# Altium PCB EasyEDA_ZX64_rev0.pcbdoc (part 2 of 3)
Units mil, origin at the board's own origin, x right, y up, seen from the top; angles counter-clockwise.
Board outline 12792.03 x 5307.23 mil, 2 copper layers (Top Layer, Bottom Layer); 152 components, 165 nets, 989 pads, 228 vias.
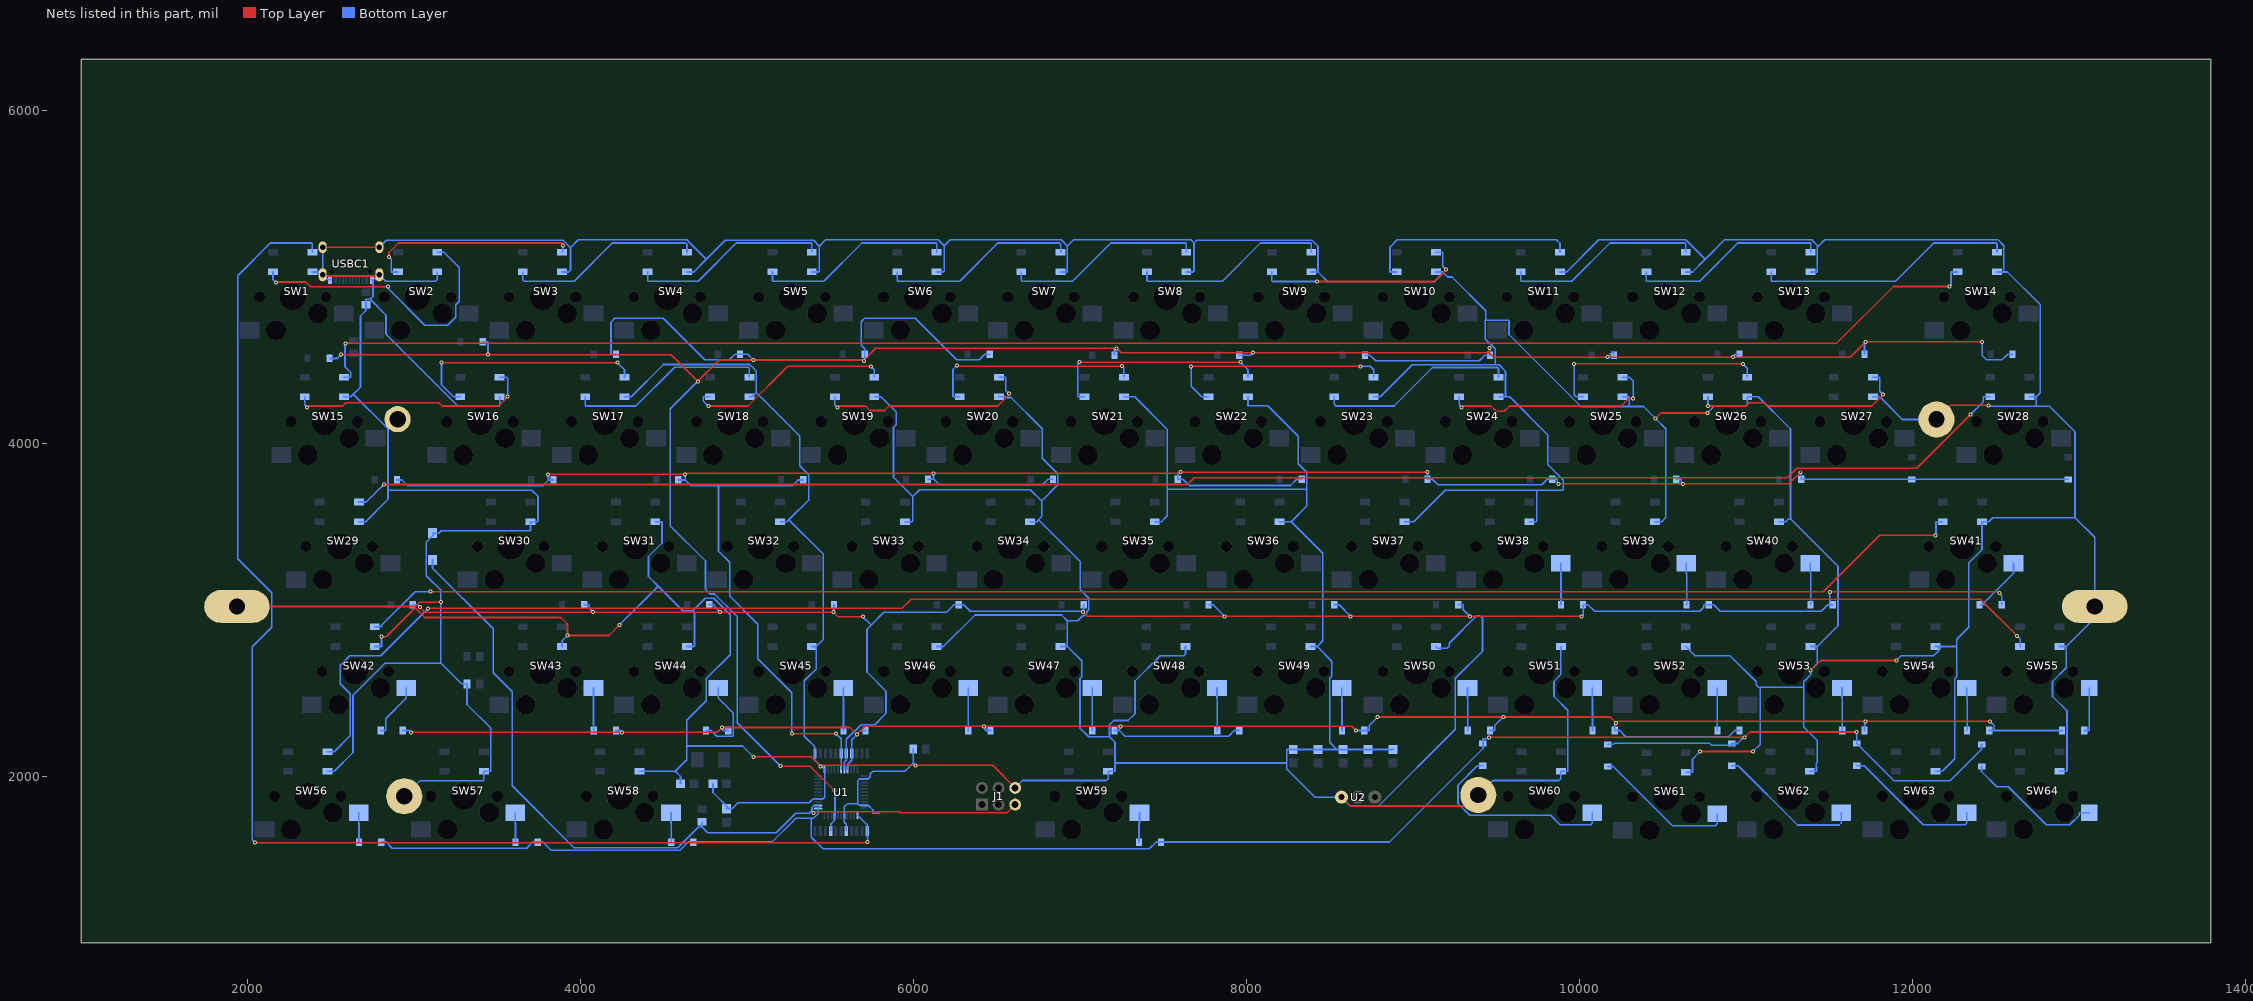
[diagram p2: the nets of this part, all layers, seen from the top]

## Via types
v1: diameter 24.02, hole 12.01, Top Layer to Bottom Layer, tented both sides, 228 vias

## Nets (pads, with @x,y where several pads share a name; then routed paths per layer and width w, separated by ;. In a path a pad name is that pad's centre, name@x,y a point inside that pad or via, vN(x,y) a via of type N, cw(c..) or ccw(c..) an arc to the next point about the centre after c; other vN are vias at no path point) (continued)
D38_2: D38.2 SW38.2 | length 250.5
  Bottom Layer w10: SW38.2@9887.28,3280 9887.28,3219.76 9888.55,3218.49 D38.2@9888.55,3030
D39_2: D39.2 SW39.2 | length 250.5
  Bottom Layer w10: SW39.2@10642.28,3280 10642.28,3219.76 10643.55,3218.49 D39.2@10643.55,3030
D40_2: D40.2 SW40.2 | length 250.5
  Bottom Layer w10: SW40.2@11387.28,3280 11387.28,3219.76 11388.55,3218.49 D40.2@11388.55,3030
D41_2: D41.2 SW41.2 | length 351.8
  Bottom Layer w10: D41.2@12403.55,3030 12433.24,3030 12433.24,3045.72 12607.28,3219.76 SW41.2@12607.28,3280
D42_2: D42.2 SW42.2 | length 336.1
  Bottom Layer w10: D42.2@2798.55,2275 2828.24,2275 2828.24,2345.72 2952.28,2469.76 SW42.2@2952.28,2530
D43_2: D43.2 SW43.2 | length 255.5
  Bottom Layer w10: SW43.2@4077.28,2530 4077.28,2309.9 4078.55,2308.63 D43.2@4078.55,2275
D44_2: D44.2 SW44.2 | length 501
  Bottom Layer w10: D44.2@4753.55,2275 4783.24,2275 4816.94,2241.3 4913.66,2241.3 4916.57,2244.21 4916.57,2380.47 4827.28,2469.76 SW44.2@4827.28,2530
D45_2: D45.2 SW45.2 | length 255.5
  Bottom Layer w10: SW45.2@5577.28,2530 5577.28,2469.76 5578.55,2468.49 D45.2@5578.55,2275
D46_2: D46.2 SW46.2 | length 255.5
  Bottom Layer w10: SW46.2@6327.28,2530 6327.28,2309.9 6328.55,2308.63 D46.2@6328.55,2275
D47_2: D47.2 SW47.2 | length 255.5
  Bottom Layer w10: SW47.2@7072.28,2530 7072.28,2469.76 7073.55,2468.49 D47.2@7073.55,2275
D48_2: D48.2 SW48.2 | length 255.5
  Bottom Layer w10: SW48.2@7822.28,2530 7822.28,2469.76 7823.55,2468.49 D48.2@7823.55,2275
D49_2: D49.2 SW49.2 | length 255.5
  Bottom Layer w10: SW49.2@8572.28,2530 8572.28,2469.76 8573.55,2468.49 D49.2@8573.55,2275
D50_2: D50.2 SW50.2 | length 255.5
  Bottom Layer w10: SW50.2@9327.28,2530 9327.28,2469.76 9328.55,2468.49 D50.2@9328.55,2275
D51_2: D51.2 SW51.2 | length 255.5
  Bottom Layer w10: SW51.2@10077.28,2530 10077.28,2469.76 10078.55,2468.49 D51.2@10078.55,2275
D52_2: D52.2 SW52.2 | length 255.5
  Bottom Layer w10: SW52.2@10827.28,2530 10827.28,2469.76 10827.28,2309.9 10828.55,2308.63 D52.2@10828.55,2275
D53_2: D53.2 SW53.2 | length 255.5
  Bottom Layer w10: SW53.2@11577.28,2530 11577.28,2469.76 11578.55,2468.49 D53.2@11578.55,2275
D54_2: D54.2 SW54.2 | length 255.5
  Bottom Layer w10: SW54.2@12327.28,2530 12327.28,2469.76 12328.55,2468.49 D54.2@12328.55,2275
D55_2: D55.2 SW55.2 | length 285
  Bottom Layer w10: D55.2@13031.82,2275 13061.5,2275 13061.5,2469.15 13062.15,2469.8 SW55.2@13062.15,2530
D56_2: D56.2 SW56.2 | length 175.5
  Bottom Layer w10: SW56.2@2667.28,1780 2667.28,1719.76 2668.55,1718.49 D56.2@2668.55,1605
D57_2: D57.2 SW57.2 | length 175.5
  Bottom Layer w10: SW57.2@3607.28,1780 3607.28,1719.76 3608.55,1718.49 D57.2@3608.55,1605
D58_2: D58.2 SW58.2 | length 175.5
  Bottom Layer w10: SW58.2@4542.28,1780 4542.28,1719.76 4543.55,1718.49 D58.2@4543.55,1605
D59_2: D59.2 SW59.2 | length 176.5
  Bottom Layer w10: D59.2@7353.55,1605 7353.55,1716.03 7357.28,1719.76 SW59.2@7357.28,1780
D60_2: D60.2 SW60.2 | length 1233.1
  Bottom Layer w10: D60.2@9420.18,2063.37 9386.55,2063.37 9270.03,1946.85 9270.03,1836.74 9341.52,1765.25 9827.6,1765.25 9883.48,1709.37 10066.89,1709.37 10077.28,1719.76 SW60.2@10077.28,1780
D61_2: D61.2 SW61.2 | length 869.4
  Bottom Layer w10: D61.2@10170.18,2058.37 10203.81,2058.37 10559.22,1702.96 10815.48,1702.96 10827.28,1714.76 SW61.2@10827.28,1775
D62_2: D62.2 SW62.2 | length 870.3
  Bottom Layer w10: D62.2@10915.18,2063.37 10953.26,2063.37 11309.76,1706.87 11559.39,1706.87 11572.28,1719.76 SW62.2@11572.28,1780
D63_2: D63.2 SW63.2 | length 873.3
  Bottom Layer w10: D63.2@11665.18,2063.37 11710.15,2063.37 12064.15,1709.37 12316.89,1709.37 12327.28,1719.76 SW63.2@12327.28,1780
D64_2: D64.2 SW64.2 | length 847.5
  Bottom Layer w10: D64.2@12415.18,2058.37 12415.18,2028.68 12506.08,1937.78 12575.58,1937.78 12804.55,1708.81 12945.81,1708.81 13001.95,1764.95 13001.95,1780 SW64.2@13062.15,1780
GND: C1.1 C2.1 C3.1 C4.1 C5.1 C6.1 C7.1 C8.1 J1.6 KEY1.1 pad.1 R2.2 R4.1 R5.2 SW1.5 SW2.5 SW3.5 SW4.5 SW5.5 SW6.5 SW7.5 SW8.5 SW9.5 SW10.5 SW11.5 SW12.5 SW13.5 SW14.5 SW15.5 SW16.5 SW17.5 SW18.5 SW19.5 SW20.5 SW21.5 SW22.5 SW23.5 SW24.5 SW25.5 SW26.5 SW27.5 SW28.5 SW29.5 SW30.5 SW31.5 SW32.5 SW33.5 SW34.5 SW35.5 SW36.5 SW37.5 SW38.5 SW39.5 SW40.5 SW41.5 SW42.5 SW43.5 SW44.5 SW45.5 SW46.5 SW47.5 SW48.5 SW49.5 SW50.5 SW51.5 SW52.5 SW53.5 SW54.5 SW55.5 SW56.5 SW57.5 SW58.5 SW59.5 SW60.5 SW61.5 SW62.5 SW63.5 SW64.5 U1.5 U1.15 U1.23 U1.35 U1.43 U2.1 USBC1.0 USBC1.A1 USBC1.A12 USBC1.B1 USBC1.B12 | length 72037.8
  Top Layer w10: pad.1@1935.18,3020 3005.7,3020 ; USBC1.0@2449.91,5012.45 2456.66,5005.69 2783.7,5005.69 USBC1.0@2790.45,5012.45 ; USBC1.0@2449.91,5177.8 USBC1.0@2790.45,5177.8 ; v1(2803.89,2838.67) 2832.66,2838.67 3005.7,3011.71 ; v1(3160.44,3046.38) 3032.08,3046.38 3005.7,3020 ; v1(4232.19,2908.38) 4169.8,2845.99 v1(3920.79,2845.99) 3920.79,2914.77 3881.76,2953.8 3063.61,2953.8 3005.7,3011.71 ; v1(5037.72,2116.37) 5384.14,2116.37 v1(5441.97,2058.54) 5448.99,2065.56 v1(6011.27,2065.56) 6474.62,2065.56 J1.6@6610.18,1930 ; U2.1@8570.18,1875 8623.42,1821.76 9325.92,1821.76 pad.1@9392.04,1887.88 ; v1(10456.22,4149.71) 10489.17,4182.66 v1(10767.63,4182.66) ; v1(10724.21,2148.47) v1(11042.67,2148.47) ; v1(11388.29,2635.02) 11449.29,2696.02 v1(11904.68,2696.02) ; pad.1@12144.98,4143.7 12229.19,4227.91 v1@12456.65,4227.91 ; 3005.7,3011.71 3005.7,3020
  Bottom Layer w10: SW1.5@2388.29,5029.61 2428.78,5029.61 USBC1.0@2449.9,5029.61 ; USBC1.0@2449.91,5177.8 USBC1.0@2449.9,5029.61 ; SW56.5@2478.29,2029.61 2518.78,2029.61 2632.09,2142.92 2632.09,2485.85 2824.65,2678.41 3160.44,2678.41 ; USBC1.B12@2500.1,4982.2 USBC1.A1@2488.29,4982.2 2480.15,4982.2 USBC1.0@2449.91,5012.45 USBC1.0@2449.9,5029.61 ; SW15.5@2578.29,4279.61 2618.78,4279.61 2634.49,4295.32 ; SW29.5@2668.29,3529.61 2708.78,3529.61 2842.49,3663.32 2842.49,3719.21 ; USBC1.B1@2740.26,4982.19 USBC1.A12@2752.07,4982.19 ; SW42.5@2763.29,2779.61 2803.78,2779.61 2803.78,2838.56 v1(2803.89,2838.67) ; USBC1.0@2790.45,5177.8 2831.86,5219.2 3893.85,5219.2 3938.45,5174.6 ; pad.1@2900.18,4145 2842.49,4087.31 ; pad.1@2940.28,1880 3034.46,1974.18 3414.67,1974.18 3418.29,1977.8 SW57.5@3418.29,2029.61 3458.78,2029.61 3458.85,2029.68 3458.85,2289.55 3317.14,2431.26 R5.2@3317.14,2555 3283.85,2555 3160.44,2678.41 ; KEY1.1@3110.18,3460.12 KEY1.1@3125.09,3460.12 ; SW2.5@3138.29,5029.61 3138.29,4984.29 3128.19,4974.19 2828.72,4974.19 USBC1.0@2790.45,5012.45 2760.2,4982.19 USBC1.A12@2752.07,4982.19 ; SW16.5@3513.29,4279.61 3513.29,4227.09 3510.38,4224.18 3261.59,4224.18 2830.48,4655.29 2830.48,4769.9 2735.14,4865.24 ; SW43.5@3888.29,2779.61 3888.29,2813.49 v1(3920.79,2845.99) ; SW3.5@3888.29,5029.61 3928.78,5029.61 3938.45,5039.28 3938.45,5174.6 ; v1(4232.19,2908.38) 4465.62,3141.81 ; SW17.5@4263.29,4279.61 4303.78,4279.61 4497.72,4473.55 5015.86,4473.55 5054.29,4435.12 5054.29,4305.43 ; SW58.5@4353.29,2029.61 4568.27,2029.61 ; SW31.5@4448.29,3529.61 4488.78,3529.61 4488.78,3401.61 4406.95,3319.78 4406.95,3200.48 4465.62,3141.81 ; C6.1@4599.63,1955 4599.63,1998.25 4568.27,2029.61 ; SW44.5@4638.29,2779.61 4678.78,2779.61 4683.62,2784.45 4683.62,2983.15 4673.26,2993.51 ; SW4.5@4638.29,5029.61 4678.78,5029.61 4754.18,5105.01 ; C7.1@4794.63,1955 4794.63,1902.9 C8.1@4891.98,1805.55 ; C8.1@4875.18,1805.55 C8.1@4891.98,1805.55 ; SW18.5@5013.29,4279.61 5028.47,4279.61 5054.29,4305.43 ; v1(5037.72,2116.37) 4972.2,2181.89 4637.49,2181.89 ; SW32.5@5198.29,3529.61 5238.78,3529.61 5250.73,3541.56 ; SW45.5@5388.29,2779.61 5402.61,2779.61 SW45.5@5414.97,2779.61 ; SW5.5@5388.29,5029.61 5428.78,5029.61 5433.87,5034.7 5433.87,5184.92 ; v1(5441.97,2058.54) v1@5443.36,2059.93 ; U1.5@5596.08,1672.12 5596.08,1712.64 5584.19,1724.53 U1.5@5584.19,1766.7 5584.19,1816.72 5602.74,1835.27 5663.92,1835.27 ; SW19.5@5763.29,4279.61 5803.78,4279.61 5895.51,4187.88 5895.51,4110.99 5879.66,4095.14 5879.66,3796.01 5994.95,3680.72 ; U1.43@5796.87,1778.42 5756.35,1778.42 5756.27,1778.5 5756.27,1797.97 5728.49,1825.75 5702.3,1825.75 5673.44,1825.75 5663.92,1835.27 ; SW33.5@5948.29,3529.61 5988.78,3529.61 5994.95,3535.78 5994.95,3680.72 ; R2.2@5997.14,2165 5997.14,2079.69 ; v1(6011.27,2065.56) 5997.14,2079.69 ; SW46.5@6138.29,2779.61 6178.78,2779.61 6368.38,2969.21 6888.29,2969.21 6923.85,2933.65 ; SW6.5@6138.29,5029.61 6178.78,5029.61 6183.86,5034.69 6183.86,5186.92 ; SW20.5@6513.29,4279.61 6553.78,4279.61 6557.95,4275.44 6585.49,4275.44 6773.53,4087.4 6773.53,3910.55 6866.57,3817.51 6866.57,3751.31 6769.25,3653.99 ; J1.6@6610.18,1930 6654.37,1974.19 7158.19,1974.19 7168.29,1984.29 SW59.5@7168.29,2029.61 7208.78,2029.61 7209.61,2030.44 7209.61,2079.45 ; SW34.5@6698.29,3529.61 6738.78,3529.61 6750.21,3541.04 ; SW47.5@6883.29,2779.61 6923.78,2779.61 ; SW7.5@6883.29,5029.61 6923.78,5029.61 6923.85,5029.68 6923.85,5185.81 ; SW21.5@7263.29,4279.61 7327.71,4279.61 7524,4083.32 7524,3724.8 ; SW35.5@7448.29,3529.61 7488.78,3529.61 7524,3564.83 7524,3724.8 ; SW48.5@7633.29,2779.61 7633.29,2734.16 7623.31,2724.18 7480.87,2724.18 7329.61,2572.92 7329.61,2376.17 7288.35,2334.91 7201.77,2334.91 7176.88,2310.02 7176.88,2236.55 ; SW8.5@7638.29,5029.61 7678.78,5029.61 7684.31,5035.14 7684.31,5203.19 ; SW22.5@8008.29,4279.61 8008.29,4225.99 8127.27,4225.99 8310.06,4043.2 8310.06,3877.71 8361.57,3826.2 8361.57,3724.8 ; SW36.5@8198.29,3529.61 8238.78,3529.61 8267.79,3529.61 ; SW49.5@8383.29,2779.61 8423.78,2779.61 ; SW9.5@8388.29,5029.61 8428.78,5029.61 8428.85,5029.68 ; SW23.5@8763.29,4279.61 8803.78,4279.61 8995.73,4471.56 9494.25,4471.56 ; C5.1@8880.18,2160.55 C4.1@8730.18,2160.55 C3.1@8580.18,2160.55 8542.62,2160.55 ; SW37.5@8948.29,3529.61 8988.78,3529.61 9003.59,3529.61 9193.19,3719.21 9743.91,3719.21 ; SW50.5@9138.29,2779.61 9149.39,2768.51 9203.72,2768.51 9217.22,2782.01 9217.22,2799.32 9380.39,2962.49 9403.87,2962.49 9417.02,2949.34 9417.02,2750.81 9254.41,2588.2 9254.41,2283.15 8792.98,1821.72 8623.46,1821.72 U2.1@8570.18,1875 8410.71,1875 8242.17,2043.54 8242.17,2079.45 ; SW10.5@9138.29,5029.61 9178.78,5029.61 9182.75,5025.65 ; pad.1@9392.04,1887.88 9478.35,1974.19 9878.19,1974.19 9888.29,1984.29 SW60.5@9888.29,2029.61 9928.78,2029.61 9929.57,2030.4 9929.57,2396.61 9846.95,2479.23 9846.95,2569.78 9888.29,2611.12 SW51.5@9888.29,2779.61 ; SW24.5@9513.29,4279.61 9555.19,4279.61 ; SW38.5@9698.29,3529.61 9738.78,3529.61 9743.91,3534.74 9743.91,3719.21 ; SW11.5@9883.29,5029.61 9923.78,5029.61 10116.44,5222.27 10638.58,5222.27 10755.01,5105.84 ; SW25.5@10258.29,4279.61 10298.78,4279.61 10298.78,4221.7 ; SW39.5@10453.29,3529.61 10493.78,3529.61 10518.53,3554.36 10518.53,4087.4 v1(10456.22,4149.71) 10384.23,4221.7 10298.78,4221.7 ; SW61.5@10638.29,2024.61 10678.78,2024.61 10678.78,2103.04 v1(10724.21,2148.47) ; SW52.5@10638.29,2779.61 10693.72,2724.18 10904.46,2724.18 11061.46,2567.18 11061.46,2548.06 11075.36,2534.16 11085.58,2534.16 ; SW12.5@10638.29,5029.61 10678.78,5029.61 10755.01,5105.84 ; v1(10767.63,4182.66) 10809.15,4224.18 10999.89,4224.18 11008.29,4232.58 SW26.5@11008.29,4279.61 11074.6,4279.61 11268.1,4086.11 11268.1,3543.49 ; v1(11042.67,2148.47) 11085.58,2191.38 11085.58,2534.16 ; SW40.5@11198.29,3529.61 11238.78,3529.61 11252.66,3543.49 11268.1,3543.49 ; SW62.5@11383.29,2029.61 11423.78,2029.61 11423.78,2055.36 11421.66,2057.48 11421.66,2076.58 11427.7,2082.62 11427.7,2215.05 11346.95,2295.8 11346.95,2534.16 ; SW53.5@11388.29,2779.61 11428.78,2779.61 ; SW13.5@11388.29,5029.61 11428.78,5029.61 11428.85,5029.68 11428.85,5178.22 11433.67,5183.04 ; SW27.5@11763.29,4279.61 11803.78,4279.61 11939.69,4143.7 pad.1@12144.98,4143.7 ; v1(11904.68,2696.02) 11931.82,2723.16 12127.16,2723.16 12158.54,2754.54 SW54.5@12158.54,2779.61 ; SW63.5@12138.29,2029.61 12178.78,2029.61 12254.4,2105.23 12254.4,2587.18 12265.86,2598.64 12265.86,2779.61 ; SW54.5@12138.29,2779.61 SW54.5@12158.54,2779.61 ; v1@12456.65,4227.91 12462.69,4221.87 12743.78,4221.87 ; SW14.5@12508.29,5029.61 12549.25,5029.61 ; SW28.5@12703.29,4279.61 12743.78,4279.61 ; SW64.5@12883.29,2029.61 12923.78,2029.61 12928.31,2034.14 12928.31,2392.87 12841.95,2479.23 12841.95,2569.78 12923.78,2651.61 12923.78,2779.61 ; SW55.5@12883.29,2779.61 12923.78,2779.61 ; 2634.49,4295.32 2676.89,4337.72 2676.89,4765.38 2710.18,4798.67 R4.1@2710.18,4831.96 2710.18,4848.6 2710.18,4865.24 2735.14,4865.24 ; 2634.49,4295.32 2842.49,4087.31 ; 2735.14,4865.24 2752.07,4882.17 USBC1.A12@2752.07,4982.19 ; 2842.49,3719.21 2842.49,4087.31 ; 2842.49,3719.21 3706.88,3719.21 3744.1,3681.99 3744.1,3534.93 3738.78,3529.61 SW30.5@3698.29,3529.61 3698.29,3477.8 3694.67,3474.18 3162,3474.18 3147.94,3460.12 KEY1.1@3125.09,3460.12 ; KEY1.1@3125.09,3460.12 3072.35,3407.38 3072.35,3205.56 3160.44,3117.47 v1(3160.44,3046.38) 3160.44,2678.41 ; 3938.45,5174.6 3986.12,5222.27 4636.91,5222.27 4754.18,5105.01 ; 4465.62,3141.81 4613.92,2993.51 4673.26,2993.51 ; 4568.27,2029.61 4637.49,2098.83 4637.49,2181.89 ; 4637.49,2181.89 4637.49,2336.28 4754.4,2453.19 4754.4,2587.18 4897.97,2730.75 4897.97,2970.05 4799.35,3068.67 4748.42,3068.67 4673.26,2993.51 ; 4754.18,5105.01 4868.37,5219.2 5399.59,5219.2 5433.87,5184.92 ; C8.1@4891.98,1805.55 4908.78,1805.55 4944.64,1841.41 5291.79,1841.41 U1.15@5332.3,1841.41 5372.82,1841.41 5396.53,1865.12 U1.15@5426.71,1865.12 5456.24,1865.12 5466.08,1874.96 U1.23@5466.08,2042.29 5448.44,2059.93 v1@5443.36,2059.93 ; 5054.29,4305.43 5315.27,4044.45 5315.27,3864.83 5369.32,3810.78 5369.32,3660.15 5250.73,3541.56 ; 5250.73,3541.56 5457.39,3334.9 5457.39,2822.03 SW45.5@5414.97,2779.61 ; SW45.5@5414.97,2779.61 5414.97,2644.61 5343.99,2573.63 5343.99,2240.33 5407.11,2177.21 U1.23@5407.11,2136.69 5407.11,2116.44 5407.11,2096.18 v1@5443.36,2059.93 ; 5433.87,5184.92 5471.22,5222.27 6148.51,5222.27 6183.86,5186.92 ; 5663.92,1835.27 5663.92,1974.37 5672.78,1983.23 U1.35@5702.3,1983.23 5726.76,1983.23 5740.3,1996.77 5740.3,2014.34 5756.35,2030.39 U1.35@5796.87,2030.39 5947.84,2030.39 5997.14,2079.69 ; 5994.95,3680.72 6036.09,3721.86 6701.38,3721.86 6769.25,3653.99 ; 6183.86,5186.92 6219.21,5222.27 6887.39,5222.27 6923.85,5185.81 ; 6750.21,3541.04 7000.06,3291.18 7000.06,3122.61 7053.04,3069.63 7053.04,3001.13 7039.82,2987.91 7039.82,2977.8 7026.32,2964.3 7016.21,2964.3 6985.56,2933.65 6923.85,2933.65 ; 6750.21,3541.04 6769.25,3560.08 6769.25,3653.99 ; 6923.78,2779.61 7010.08,2693.31 7010.08,2597.86 6999.4,2587.18 6999.4,2288.55 7051.4,2236.55 7176.88,2236.55 ; 6923.78,2779.61 6923.85,2779.68 6923.85,2933.65 ; 6923.85,5185.81 6960.31,5222.27 7665.23,5222.27 7684.31,5203.19 ; 7176.88,2236.55 7209.61,2203.82 7209.61,2079.45 ; 7209.61,2079.45 8242.17,2079.45 ; 7524,3724.8 8361.57,3724.8 ; 7684.31,5203.19 7700.48,5219.36 8393.48,5219.36 8428.85,5183.99 8428.85,5029.68 ; 8242.17,2079.45 8242.17,2160.1 8242.62,2160.55 C1.1@8280.18,2160.55 C2.1@8430.18,2160.55 8542.62,2160.55 ; 8267.79,3529.61 8457.39,3340.01 8457.39,2813.22 8423.78,2779.61 ; 8267.79,3529.61 8361.57,3623.39 8361.57,3724.8 ; 8423.78,2779.61 8512.71,2690.68 8512.71,2601.5 8499.41,2588.2 8499.41,2203.76 8542.62,2160.55 ; 8428.85,5029.68 8488.18,4970.35 9127.45,4970.35 9182.75,5025.65 ; 9182.75,5025.65 9209.42,4998.97 9234.31,4998.97 9436.22,4797.06 9436.22,4740.31 ; 9436.22,4740.31 9433.31,4737.4 9433.31,4626.45 9454.86,4604.9 9457.69,4604.9 9494.25,4568.34 9494.25,4471.56 ; 9436.22,4740.31 9573.8,4740.31 9576.71,4737.4 9576.71,4654.06 10009.07,4221.7 10298.78,4221.7 ; 9494.25,4471.56 9517.11,4471.56 9555.19,4433.48 9555.19,4279.61 ; 9555.19,4279.61 9580.33,4279.61 9810.27,4049.67 9810.27,3872.89 9903.05,3780.11 9903.05,3719.21 9743.91,3719.21 ; 10755.01,5105.84 10871.44,5222.27 11394.43,5222.27 11433.67,5183.04 ; 11085.58,2534.16 11346.95,2534.16 ; 11268.1,3543.49 11270.6,3543.49 11553.15,3260.94 11553.15,2903.98 11428.78,2779.61 ; 11346.95,2534.16 11346.95,2568.02 11388.29,2609.36 v1(11388.29,2635.02) 11428.78,2675.51 11428.78,2779.61 ; 11433.67,5183.04 11472.9,5222.27 12514.19,5222.27 12549.25,5187.21 12549.25,5029.61 ; SW54.5@12158.54,2779.61 12178.78,2779.61 12265.86,2779.61 ; 12265.86,2779.61 12265.86,2823.15 12338.6,2895.89 12338.6,3281.43 12418.29,3361.12 SW41.5@12418.29,3529.61 12458.78,3529.61 12482.78,3553.61 12977.03,3553.61 ; 12549.25,5029.61 12571.66,5029.61 12767.39,4833.88 12767.39,4303.22 12743.78,4279.61 ; 12743.78,4221.87 12825.13,4221.87 12977.03,4069.97 12977.03,3553.61 ; 12743.78,4221.87 12743.78,4279.61 ; 12923.78,2779.61 13095.18,2951.01 pad.1@13095.18,3020 13095.18,3435.46 12977.03,3553.61
  other v1: 12456.65,4227.91
RESET: J1.5 KEY1.2 R1.2 U1.13 | length 4977.3
  Top Layer w10: v1(5398.01,1780.76) 5404.16,1786.91 5914.19,1786.91 5920.34,1780.76 6560.94,1780.76 J1.5@6610.18,1830
  Bottom Layer w10: KEY1.2@3110.18,3299.88 3110.18,3250.21 3474.16,2886.23 3474.16,2622.52 3589.05,2507.63 3589.05,1942.34 3960.09,1571.3 4583.67,1571.3 4709.09,1696.72 4730.18,1696.72 ; R1.2@4730.18,1726.96 4730.18,1696.72 ; v1(5398.01,1780.76) 5389.47,1789.3 ; U1.13@5426.71,1825.75 5402.58,1825.75 5389.47,1812.64 5389.47,1789.3 ; 4730.18,1696.72 4730.18,1693.67 4762.42,1661.43 5174.8,1661.43 5291.79,1778.42 U1.13@5332.3,1778.42 5372.82,1778.42 5383.7,1789.3 5389.47,1789.3
RGB0: SW1.6 U1.1 | length 8000.8
  Top Layer w10: v1(2044.23,1601.4) 5721.43,1601.4 v1(5724.24,1604.21)
  Bottom Layer w10: v1(2044.23,1601.4) 2027.15,1618.48 2027.15,2778.48 2143.78,2895.11 2143.78,3103.18 1939.46,3307.5 1939.46,5006.67 2135.94,5203.15 2384.67,5203.15 2388.29,5199.53 SW1.6@2388.29,5147.72 ; U1.1@5662.93,1766.7 5716.99,1712.64 5722.07,1712.64 5722.07,1692.38 U1.1@5722.07,1672.12 5722.07,1631.61 5724.24,1629.44 v1(5724.24,1604.21)
RGB1: SW14.4 SW15.6 | length 10166.1
  Top Layer w10: v1(2588.76,4600.4) 11544.07,4600.4 11886.12,4942.45 v1@12222.96,4942.45
  Bottom Layer w10: SW15.6@2578.29,4397.72 2618.78,4397.72 2618.78,4425.44 2584.67,4459.55 2584.67,4596.31 v1(2588.76,4600.4) ; v1@12222.96,4942.45 12231.53,4951.02 12231.53,5029.61 SW14.4@12272.07,5029.61
  other v1: 12222.96,4942.45
RGB2: SW28.4 SW29.6 | length 10077.6
  Top Layer w10: v1(2817.67,3752.89) 7644.65,3752.89 7685.86,3794.1 11247.88,3794.1 11304.23,3850.45 12026.52,3850.45 v1(12348.39,4172.32)
  Bottom Layer w10: SW29.6@2668.29,3647.72 2712.5,3647.72 v1(2817.67,3752.89) ; v1(12348.39,4172.32) 12426.53,4250.46 12426.53,4279.61 SW28.4@12467.07,4279.61
RGB3: SW41.4 SW42.6 | length 9732.4
  Top Layer w10: v1(3097.42,3108.7) 11464.01,3108.7 11803.04,3447.73 v1(12139.01,3447.73)
  Bottom Layer w10: SW42.6@2763.29,2897.72 2803.78,2897.72 2803.78,2907 3005.48,3108.7 v1(3097.42,3108.7) ; v1(12139.01,3447.73) 12141.53,3450.25 12141.53,3529.61 SW41.4@12182.07,3529.61
RGB4: SW55.4 SW56.6 | length 11025.4
  Top Layer w10: v1(3084.1,3009.4) 5930.77,3009.4 5985.27,3063.9 12408.23,3063.9 v1(12629.35,2842.78)
  Bottom Layer w10: SW56.6@2478.29,2147.72 2518.78,2147.72 2616.03,2244.97 2616.03,2496.05 2555.62,2556.46 2555.62,2667.22 2612.59,2724.19 2798.89,2724.19 v1(3084.1,3009.4) ; v1(12629.35,2842.78) 12647.07,2825.06 SW55.4@12647.07,2779.61
ROW0: D1.1 D2.1 D3.1 D4.1 D5.1 D6.1 D7.1 D8.1 D9.1 D10.1 D11.1 D12.1 D13.1 D14.1 U1.8 | length 17404.2
  Top Layer w10: v1(2561.61,4533.14) v1(3443.39,4533.14) 4543.86,4533.14 v1(4704,4373) 4831.66,4500.66 v1(5038.72,4500.66) v1@5702.72,4500.66 ; v1(5201.29,2060.82) 5377.66,2060.82 v1(5524.3,1914.18) ; v1(5702.72,4493.89) v1@5702.72,4500.66 ; v1(9458.39,4571.58) 9458.39,4544.56 ; v1(12419.08,4609.81) v1(11719.06,4609.81) 11626.78,4517.53 v1(10923.51,4517.53) v1(10168.14,4517.53) 9485.42,4517.53 9458.39,4544.56 ; v1@5702.72,4500.66 5773.27,4571.21 v1(7220.19,4571.21) 7246.84,4544.56 v1(8038.72,4544.56) 9458.39,4544.56
  Bottom Layer w10: D1.1@2491.82,4510 2538.47,4510 v1(2561.61,4533.14) ; D2.1@3411.82,4610 3441.5,4610 3443.39,4608.11 v1(3443.39,4533.14) ; D3.1@4211.81,4535 4182.12,4535 4182.12,4727.27 4205.44,4750.59 4496.92,4750.59 4746.21,4501.3 4893.42,4501.3 4927.12,4535 D4.1@4956.81,4535 5004.38,4535 v1(5038.72,4500.66) ; v1(4704,4373) 4539.04,4208.04 4539.04,3503.97 4749.39,3293.62 4749.39,3123.26 4777.29,3095.36 4804.32,3095.36 4940.28,2959.4 4940.28,2321.83 v1(5201.29,2060.82) ; U1.8@5501.59,1672.12 5501.59,1712.64 5525.14,1736.19 U1.8@5525.14,1766.7 5527.64,1769.2 5527.64,1910.84 v1(5524.3,1914.18) ; v1(5702.72,4493.89) 5706.81,4497.98 D5.1@5706.81,4535 5706.81,4568.63 5685.56,4589.88 5685.56,4730.71 5705.44,4750.59 6009,4750.59 6258.28,4501.31 6393.43,4501.31 6427.12,4535 D6.1@6456.81,4535 ; D7.1@7206.81,4530 7206.81,4563.63 7212.61,4563.63 v1(7220.19,4571.21) ; D8.1@7956.81,4530 8024.16,4530 v1(8038.72,4544.56) ; D9.1@8711.82,4530 8741.5,4530 8775.2,4496.3 9398.42,4496.3 9432.12,4530 D10.1@9461.82,4530 9461.81,4568.16 v1(9458.39,4571.58) ; v1(10168.14,4517.53) 10197.43,4546.82 10206.81,4546.82 D11.1@10206.82,4530 ; v1(10923.51,4517.53) 10932.12,4526.14 10932.12,4535 D12.1@10961.82,4535 ; D13.1@11711.82,4535 11711.81,4602.56 v1(11719.06,4609.81) ; v1(12419.08,4609.81) 12419.08,4527.5 12445.28,4501.3 12538.42,4501.3 12572.12,4535 D14.1@12601.82,4535
ROW1: D15.1 D16.1 D17.1 D18.1 D19.1 D20.1 D21.1 D22.1 D23.1 D24.1 D25.1 D26.1 D27.1 D28.1 U1.28 | length 14983.4
  Top Layer w10: v1(3802.7,3814.11) v1(4627.91,3814.11) 4633.44,3819.64 v1(6119.19,3819.64) 7595.14,3819.64 v1(7602.46,3826.96) v1(9085.99,3826.96) ; v1(5268.38,2256.04) v1(5533.22,2256.04) ; v1(9875.18,3756.38) v1(10620.62,3756.38) 11257.51,3756.38 v1(11327.53,3826.4)
  Bottom Layer w10: D15.1@2896.82,3780 2926.5,3780 2960.2,3746.3 3773.42,3746.3 3807.12,3780 ; v1(3802.7,3814.11) 3807.12,3809.69 3807.12,3780 ; D16.1@3836.82,3780 3807.12,3780 ; D17.1@4586.81,3780 4616.5,3780 4627.91,3780 ; v1(4627.91,3814.11) 4627.91,3780 ; v1(5268.38,2256.04) 5268.38,2501.88 5063.65,2706.61 5063.65,2914.07 4894.62,3083.1 4894.62,3285.89 4827.89,3352.62 4827.89,3746.3 ; D18.1@5336.81,3780 5321.97,3780 5307.12,3780 5273.42,3746.3 4827.89,3746.3 ; v1(5533.22,2256.04) 5564.59,2224.67 U1.28@5564.59,2136.69 5564.59,2116.44 5564.59,2096.18 5564.51,2096.1 U1.28@5564.51,2042.29 ; D19.1@6086.81,3785 6101.66,3785 6116.5,3785 6119.19,3787.69 ; v1(6119.19,3819.64) 6119.19,3787.69 ; D20.1@6836.81,3785 6807.12,3785 6773.42,3751.3 6155.58,3751.3 6119.19,3787.69 ; v1(7602.46,3826.96) 7594.13,3818.63 7586.81,3818.63 D21.1@7586.81,3785 7601.66,3785 7616.5,3785 7655.06,3746.44 8263.56,3746.44 8302.12,3785 D22.1@8331.82,3785 ; v1(9085.99,3826.96) 9086.81,3826.14 9086.81,3818.63 D23.1@9086.82,3785 9116.5,3785 9150.2,3751.3 9773.42,3751.3 9807.12,3785 D24.1@9836.82,3785 9866.5,3785 9866.5,3765.06 v1(9875.18,3756.38) ; D25.1@10581.82,3785 10611.5,3785 10611.5,3765.5 v1(10620.62,3756.38) ; v1(11327.53,3826.4) 11331.81,3822.12 D26.1@11331.82,3785 11361.5,3785 11363.13,3783.37 D27.1@11995.18,3783.37 12901.55,3783.37 D28.1@12935.18,3783.37 ; 4627.91,3780 4661.61,3746.3 4827.89,3746.3
ROW2: D29.1 D30.1 D31.1 D32.1 D33.1 D34.1 D35.1 D36.1 D37.1 D38.1 D39.1 D40.1 D41.1 U1.29 | length 11679.2
  Top Layer w10: v1(3034.86,3015.76) 3064.29,2986.33 v1(4075.31,2986.33) v1(4838.44,2986.33) v1(5519.15,2986.33) 5546.26,2959.22 v1(5695.06,2959.22) ; v1(7016.76,2987.36) 7043.42,2960.7 v1(7867.82,2960.7) v1(8623.37,2960.7) v1(9341.11,2960.7) v1(10011.53,2960.7) ; v1(11503.84,3108) 12514.74,3108 v1(12522.46,3100.28)
  Bottom Layer w10: D29.1@2991.82,3030 3021.5,3030 3021.5,3029.12 v1(3034.86,3015.76) ; D30.1@4021.82,3030 4051.5,3030 4051.5,3010.14 v1(4075.31,2986.33) ; D31.1@4771.81,3030 4801.5,3030 4801.5,3023.27 v1(4838.44,2986.33) ; v1(5519.15,2986.33) 5521.81,2988.99 D32.1@5521.81,3030 ; U1.29@5584.19,2042.29 5584.19,2084.29 5596.08,2096.18 5596.08,2116.44 U1.29@5596.08,2136.69 5596.08,2221.8 5684.6,2310.32 5766.72,2310.32 5834.61,2378.21 5834.61,2511.63 5719.66,2626.58 5719.66,2883.42 5745.26,2909.02 ; v1(5695.06,2959.22) 5745.26,2909.02 ; v1(7016.76,2987.36) v1@7016.76,2991.32 ; D34.1@7021.81,3030 7021.81,2996.37 v1@7016.76,2991.32 ; D35.1@7771.81,3030 7801.5,3030 7801.5,3027.02 v1(7867.82,2960.7) ; D36.1@8526.82,3030 8556.5,3030 8623.37,2963.13 v1(8623.37,2960.7) ; D37.1@9271.82,3030 9301.5,3030 9301.5,3000.31 v1(9341.11,2960.7) ; v1(10011.53,2960.7) 10021.81,2970.98 D38.1@10021.82,3030 10036.66,3030 10051.5,3030 10090.9,2990.6 10723.07,2990.6 10747.12,3014.65 10747.12,3030 D39.1@10776.82,3030 10806.5,3030 10845.69,2990.81 11452.93,2990.81 11492.12,3030 D40.1@11506.97,3030 ; v1(11503.84,3108) 11503.84,3033.13 D40.1@11506.97,3030 ; D40.1@11521.82,3030 D40.1@11506.97,3030 ; v1(12522.46,3100.28) 12536.81,3085.93 D41.1@12536.82,3030 ; 5745.26,2909.02 5821.51,2985.27 6197.39,2985.27 6242.12,3030 6256.97,3030 D33.1@6271.81,3030 6301.5,3030 6340.18,2991.32 v1@7016.76,2991.32
ROW3: D42.1 D43.1 D44.1 D45.1 D46.1 D47.1 D48.1 D49.1 D50.1 D51.1 D52.1 D53.1 D54.1 D55.1 U1.30 | length 12446.9
  Top Layer w10: v1(2981.55,2263.71) v1(4249.31,2263.71) 4819.83,2263.71 v1(4848.81,2292.69) 5617.76,2292.69 v1(5659.63,2250.82) 5708.72,2299.91 v1(6424.2,2299.91) v1(7243.82,2299.91) 8631.28,2299.91 v1(8656.15,2275.04) ; v1(8787.88,2356.07) v1(9542.88,2356.07) 10184.64,2356.07 v1(10219.61,2321.1) 10229.01,2330.5 v1(11716.83,2330.5) v1(12465.56,2330.5)
  Bottom Layer w10: D42.1@2931.82,2275 2961.5,2275 2970.26,2275 v1(2981.55,2263.71) ; D43.1@4211.81,2275 4241.5,2275 4241.5,2271.52 v1(4249.31,2263.71) ; v1(4848.81,2292.69) 4848.81,2283.31 4857.12,2275 D44.1@4886.81,2275 ; U1.30@5603.88,2042.29 5603.88,2072.48 5627.58,2096.18 5627.58,2116.44 U1.30@5627.58,2136.69 5627.58,2218.77 v1(5659.63,2250.82) 5659.63,2252.51 5682.12,2275 5696.97,2275 D45.1@5711.81,2275 ; v1(6424.2,2299.91) 6432.12,2291.99 6432.12,2275 D46.1@6461.81,2275 ; D47.1@7206.81,2275 7221.66,2275 7229.08,2275 ; v1(7243.82,2299.91) 7243.82,2289.74 7229.08,2275 ; D48.1@7956.81,2275 7927.12,2275 7893.42,2241.3 7270.2,2241.3 7236.5,2275 7229.08,2275 ; v1(8656.15,2275.04) 8677.08,2275.04 8677.12,2275 D49.1@8706.82,2275 8736.5,2275 8736.5,2304.69 v1(8787.88,2356.07) ; D50.1@9461.82,2275 9491.5,2275 9491.5,2304.69 v1(9542.88,2356.07) ; v1(10219.61,2321.1) 10211.81,2313.3 D51.1@10211.82,2275 10241.5,2275 10278.33,2238.17 10895.29,2238.17 10932.12,2275 D52.1@10961.82,2275 ; D53.1@11711.82,2275 11711.81,2308.63 11716.83,2313.65 v1(11716.83,2330.5) ; D54.1@12461.82,2275 12491.5,2275 ; v1(12465.56,2330.5) 12491.5,2304.56 12491.5,2275 ; D55.1@12898.55,2275 12491.5,2275
ROW4: D56.1 D57.1 D58.1 D59.1 D60.1 D61.1 D62.1 D63.1 D64.1 U1.12 | length 11438.3
  Top Layer w10: v1(9457.16,2233.61) v1(10991.48,2233.61) 11024.35,2266.48 v1(11662.73,2266.48)
  Bottom Layer w10: D56.1@2801.82,1605 2831.5,1605 2868.36,1568.14 3675.26,1568.14 3712.12,1605 D57.1@3741.82,1605 3771.5,1605 3821.45,1555.05 4597.17,1555.05 4647.12,1605 D58.1@4676.81,1605 5149.86,1605 5291.79,1746.93 U1.12@5332.3,1746.93 5352.56,1746.93 5372.82,1746.93 5386.03,1746.93 ; U1.12@5426.71,1806.07 5426.71,1776.84 5396.8,1746.93 5386.03,1746.93 ; v1(9457.16,2233.61) 9449.87,2226.32 9420.18,2226.32 D60.1@9420.18,2196.63 9420.18,2166.94 8858.24,1605 D59.1@7486.81,1605 7471.97,1605 7457.12,1605 7416.04,1563.92 5456.15,1563.92 5386.03,1634.04 5386.03,1746.93 ; D61.1@10170.18,2191.63 10203.81,2191.63 10210.33,2198.15 10780.73,2198.15 10792.94,2185.94 10921.31,2185.94 D62.1@10932,2196.63 ; D62.1@10915.18,2196.63 D62.1@10932,2196.63 ; v1(10991.48,2233.61) 10985.79,2233.61 10948.81,2196.63 D62.1@10932,2196.63 ; v1(11662.73,2266.48) 11665.18,2264.03 D63.1@11665.18,2207.59 ; D63.1@11665.18,2196.63 D63.1@11665.18,2207.59 ; D64.1@12415.18,2191.63 12415.18,2161.94 12227.42,1974.18 11888.28,1974.18 11665.18,2197.28 D63.1@11665.18,2207.59
SW1_4: SW1.4 SW2.6 | length 1762.6
  Top Layer w10: v1(2169.79,4965.83) 2173.52,4969.56 2348.54,4969.56 2376.75,4941.35 v1(2842.53,4941.35)
  Bottom Layer w10: SW1.4@2152.07,5029.61 2152.07,4983.55 v1(2169.79,4965.83) ; v1(2842.53,4941.35) 2842.53,4930.75 3063.54,4709.74 3201.19,4709.74 3248.79,4757.34 3248.79,4832.58 3269.94,4853.73 3269.94,5056.56 3178.78,5147.72 SW2.6@3138.29,5147.72
SW2_4: SW2.4 SW3.6 | length 1282.5
  Top Layer w10: v1(2848.78,5119.92) 2848.78,5146.23 2905.7,5203.15 3884.92,5203.15 3892.54,5195.53 v1(3892.54,5187.89)
  Bottom Layer w10: v1(2848.78,5119.92) 2861.53,5107.17 2861.53,5029.61 SW2.4@2902.07,5029.61 ; SW3.6@3888.29,5147.72 3892.54,5151.97 v1(3892.54,5187.89)
SW3_4: SW3.4 SW4.6 | length 1183.6
  Bottom Layer w10: SW3.4@3652.07,5029.61 3652.07,4981.85 3659.74,4974.18 3961.02,4974.18 4189.98,5203.14 4631.82,5203.14 4638.29,5196.67 SW4.6@4638.29,5147.72
SW4_4: SW4.4 SW5.6 | length 1189.8
  Bottom Layer w10: SW4.4@4402.07,5029.61 4402.07,4977.81 4405.7,4974.18 4706.29,4974.18 4935.25,5203.14 5388.24,5203.14 5388.29,5203.09 SW5.6@5388.29,5147.72
SW5_4: SW5.4 SW6.6 | length 1188.1
  Bottom Layer w10: SW5.4@5152.07,5029.61 5152.07,4977.81 5155.7,4974.18 5461.16,4974.18 5690.13,5203.15 6135.38,5203.15 6138.29,5200.24 SW6.6@6138.29,5147.72
SW6_4: SW6.4 SW7.6 | length 1181
  Bottom Layer w10: SW6.4@5902.07,5029.61 5902.07,4977.81 5905.7,4974.18 6277.07,4974.18 6506.03,5203.14 6876.82,5203.14 6883.29,5196.67 SW7.6@6883.29,5147.72
SW7_4: SW7.4 SW8.6 | length 1191.9
  Bottom Layer w10: SW7.4@6647.07,5029.61 6647.07,4977.81 6650.7,4974.18 6954.6,4974.18 7183.72,5203.3 7632.94,5203.3 7638.29,5197.95 SW8.6@7638.29,5147.72
SW8_4: SW8.4 SW9.6 | length 1188.1
  Bottom Layer w10: SW8.4@7402.07,5029.61 7402.07,4977.09 7404.98,4974.18 7855.11,4974.18 8084.08,5203.15 8384.67,5203.15 8388.29,5199.53 SW9.6@8388.29,5147.72
SW9_4: SW9.4 SW10.6 | length 1284.7
  Top Layer w10: v1(8422.64,4971.99) 9128.03,4971.99 v1(9199.62,5043.58)
  Bottom Layer w10: SW9.4@8152.07,5029.61 8152.07,4977.81 8157.89,4971.99 v1(8422.64,4971.99) ; SW10.6@9138.29,5147.72 9178.78,5147.72 9178.78,5064.42 v1(9199.62,5043.58)
SW10_4: SW10.4 SW11.6 | length 1290.9
  Bottom Layer w10: SW10.4@8902.07,5029.61 8861.53,5029.61 8861.46,5029.68 8861.46,5178.21 8905.52,5222.27 9861.26,5222.27 9883.29,5200.24 SW11.6@9883.29,5147.72
SW11_4: SW11.4 SW12.6 | length 1192.9
  Bottom Layer w10: SW11.4@9647.07,5029.61 9647.07,4977.81 9650.7,4974.18 9954.36,4974.18 10183.33,5203.15 10634.99,5203.15 10638.29,5199.85 SW12.6@10638.29,5147.72
SW12_4: SW12.4 SW13.6 | length 1189.9
  Bottom Layer w10: SW12.4@10402.07,5029.61 10402.07,4977.65 10405.55,4974.17 10722.16,4974.17 10951.13,5203.14 11388.24,5203.14 11388.29,5203.09 SW13.6@11388.29,5147.72
SW13_4: SW13.4 SW14.6 | length 1558.1
  Bottom Layer w10: SW13.4@11152.07,5029.61 11152.07,4977.09 11154.98,4974.18 11898.23,4974.18 12127.2,5203.15 12504.67,5203.15 12508.29,5199.53 SW14.6@12508.29,5147.72
SW15_4: SW15.4 SW16.6 | length 1476.8
  Top Layer w10: v1(2356.91,4216.63) 2364.46,4224.18 2570.22,4224.18 2589.46,4243.42 3148.11,4243.42 3167.35,4224.18 3505.22,4224.18 v1(3561.19,4280.15)
  Bottom Layer w10: SW15.4@2342.07,4279.61 2342.07,4231.47 v1(2356.91,4216.63) ; SW16.6@3513.29,4397.72 3553.78,4397.72 3561.19,4390.31 v1(3561.19,4280.15)
SW16_4: SW16.4 SW17.6 | length 1438.6
  Top Layer w10: v1(3163.64,4485.12) v1(4221.21,4485.12)
  Bottom Layer w10: v1(3163.64,4485.12) 3163.64,4352.5 3236.53,4279.61 SW16.4@3277.07,4279.61 ; v1(4221.21,4485.12) 4263.29,4443.04 SW17.6@4263.29,4397.72
SW17_4: SW17.4 SW18.6 | length 1191.4
  Bottom Layer w10: SW17.4@4027.07,4279.61 4027.07,4227.81 4030.7,4224.18 4331.6,4224.18 4564.54,4457.12 5006.41,4457.12 5013.29,4450.24 SW18.6@5013.29,4397.72
SW18_4: SW18.4 SW19.6 | length 1256.8
  Top Layer w10: v1(4766.94,4224.18) 5005.22,4224.18 5243.33,4462.29 v1(5744.04,4462.29)
  Bottom Layer w10: v1(4766.94,4224.18) 4736.53,4254.59 4736.53,4279.61 SW18.4@4777.07,4279.61 ; v1(5744.04,4462.29) 5763.29,4443.04 SW19.6@5763.29,4397.72
SW19_4: SW19.4 SW20.6 | length 1308
  Top Layer w10: v1(5541.31,4216.29) 5549.2,4224.18 5711.82,4224.18 5738.32,4197.68 5825.64,4197.68 5852.14,4224.18 6505.22,4224.18 6572.53,4291.49 v1(6572.53,4298.5)
  Bottom Layer w10: SW19.4@5527.07,4279.61 5527.07,4230.53 v1(5541.31,4216.29) ; SW20.6@6513.29,4397.72 6553.78,4397.72 6553.78,4317.25 v1(6572.53,4298.5)
SW20_4: SW20.4 SW21.6 | length 1302.9
  Top Layer w10: v1(6261.59,4468.34) 6265.91,4464.02 v1(7252.03,4464.02)
  Bottom Layer w10: v1(6261.59,4468.34) 6236.46,4443.21 6236.46,4279.68 6236.53,4279.61 SW20.4@6277.07,4279.61 ; v1(7252.03,4464.02) 7263.29,4452.76 SW21.6@7263.29,4397.72
SW21_4: SW21.4 SW22.6 | length 1328.7
  Top Layer w10: v1(6996.48,4487.33) v1(7964,4487.33)
  Bottom Layer w10: v1(6996.48,4487.33) 6985.52,4476.37 6985.52,4280.62 6986.53,4279.61 SW21.4@7027.07,4279.61 ; v1(7964,4487.33) 8008.29,4443.04 SW22.6@8008.29,4397.72
SW22_4: SW22.4 SW23.6 | length 1398.7
  Top Layer w10: v1(7667.6,4462.29) v1(8685.47,4462.29)
  Bottom Layer w10: v1(7667.6,4462.29) 7667.6,4343.54 7731.53,4279.61 SW22.4@7772.07,4279.61 ; v1(8685.47,4462.29) 8744.04,4462.29 8763.29,4443.04 SW23.6@8763.29,4397.72
SW23_4: SW23.4 SW24.6 | length 1186.1
  Bottom Layer w10: SW23.4@8527.07,4279.61 8527.07,4234.3 8537.19,4224.18 8886.01,4224.18 9117.33,4455.5 9507.75,4455.5 9513.29,4449.96 SW24.6@9513.29,4397.72
SW24_4: SW24.4 SW25.6 | length 1326.2
  Top Layer w10: v1(9291.68,4216.63) 9299.23,4224.18 9468.72,4224.18 9500.6,4192.3 9548.28,4192.3 9580.16,4224.18 10250.22,4224.18 10295.59,4269.55 v1(10322.14,4269.55)
  Bottom Layer w10: SW24.4@9277.07,4279.61 9277.07,4231.24 v1(9291.68,4216.63) ; SW25.6@10258.29,4397.72 10298.78,4397.72 10322.14,4374.36 v1(10322.14,4269.55)
SW25_4: SW25.4 SW26.6 | length 1347.3
  Top Layer w10: v1(9968.31,4477.23) v1(10981.3,4477.23)
  Bottom Layer w10: v1(9968.31,4477.23) 9968.31,4292.83 9981.53,4279.61 SW25.4@10022.07,4279.61 ; v1(10981.3,4477.23) 11008.29,4450.24 SW26.6@11008.29,4397.72
SW26_4: SW26.4 SW27.6 | length 1306.9
  Top Layer w10: v1(10771.02,4224.18) 11000.22,4224.18 11019.46,4243.42 11111.01,4243.42 11130.25,4224.18 11755.22,4224.18 v1@11824.05,4293.01
  Bottom Layer w10: v1(10771.02,4224.18) 10772.07,4225.23 SW26.4@10772.07,4279.61 ; SW27.6@11763.29,4397.72 11803.78,4397.72 11803.78,4313.28 v1@11824.05,4293.01
  other v1: 11824.05,4293.01